# Altium PCB Beacon.PcbDoc
Units mm, origin at the board's own origin, x right, y up, seen from the top; angles counter-clockwise.
Board outline 47.6 x 56 mm, 2 copper layers (Top Layer, Bottom Layer); 33 components, 44 nets, 181 pads, 53 vias.
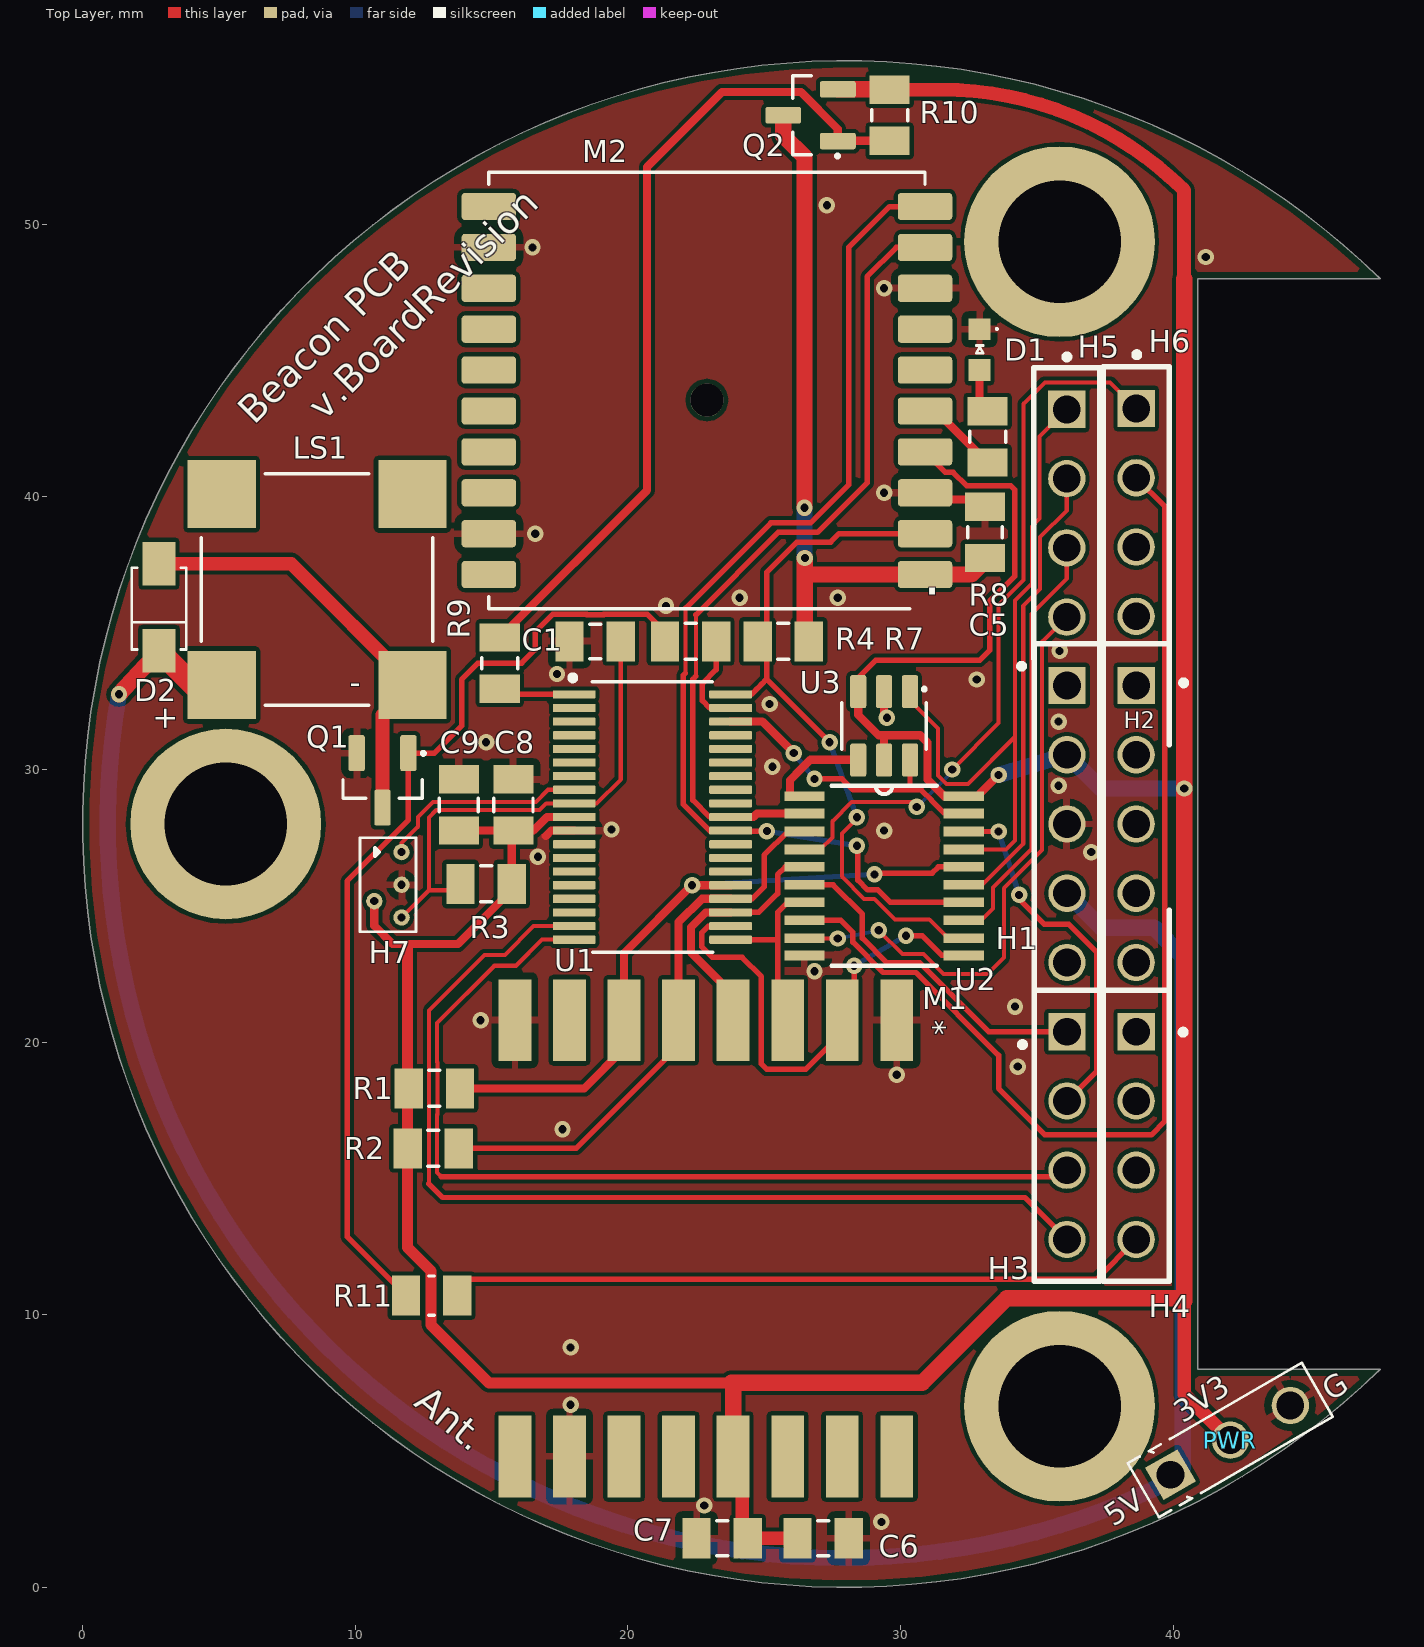
[diagram p0: Top Layer view]
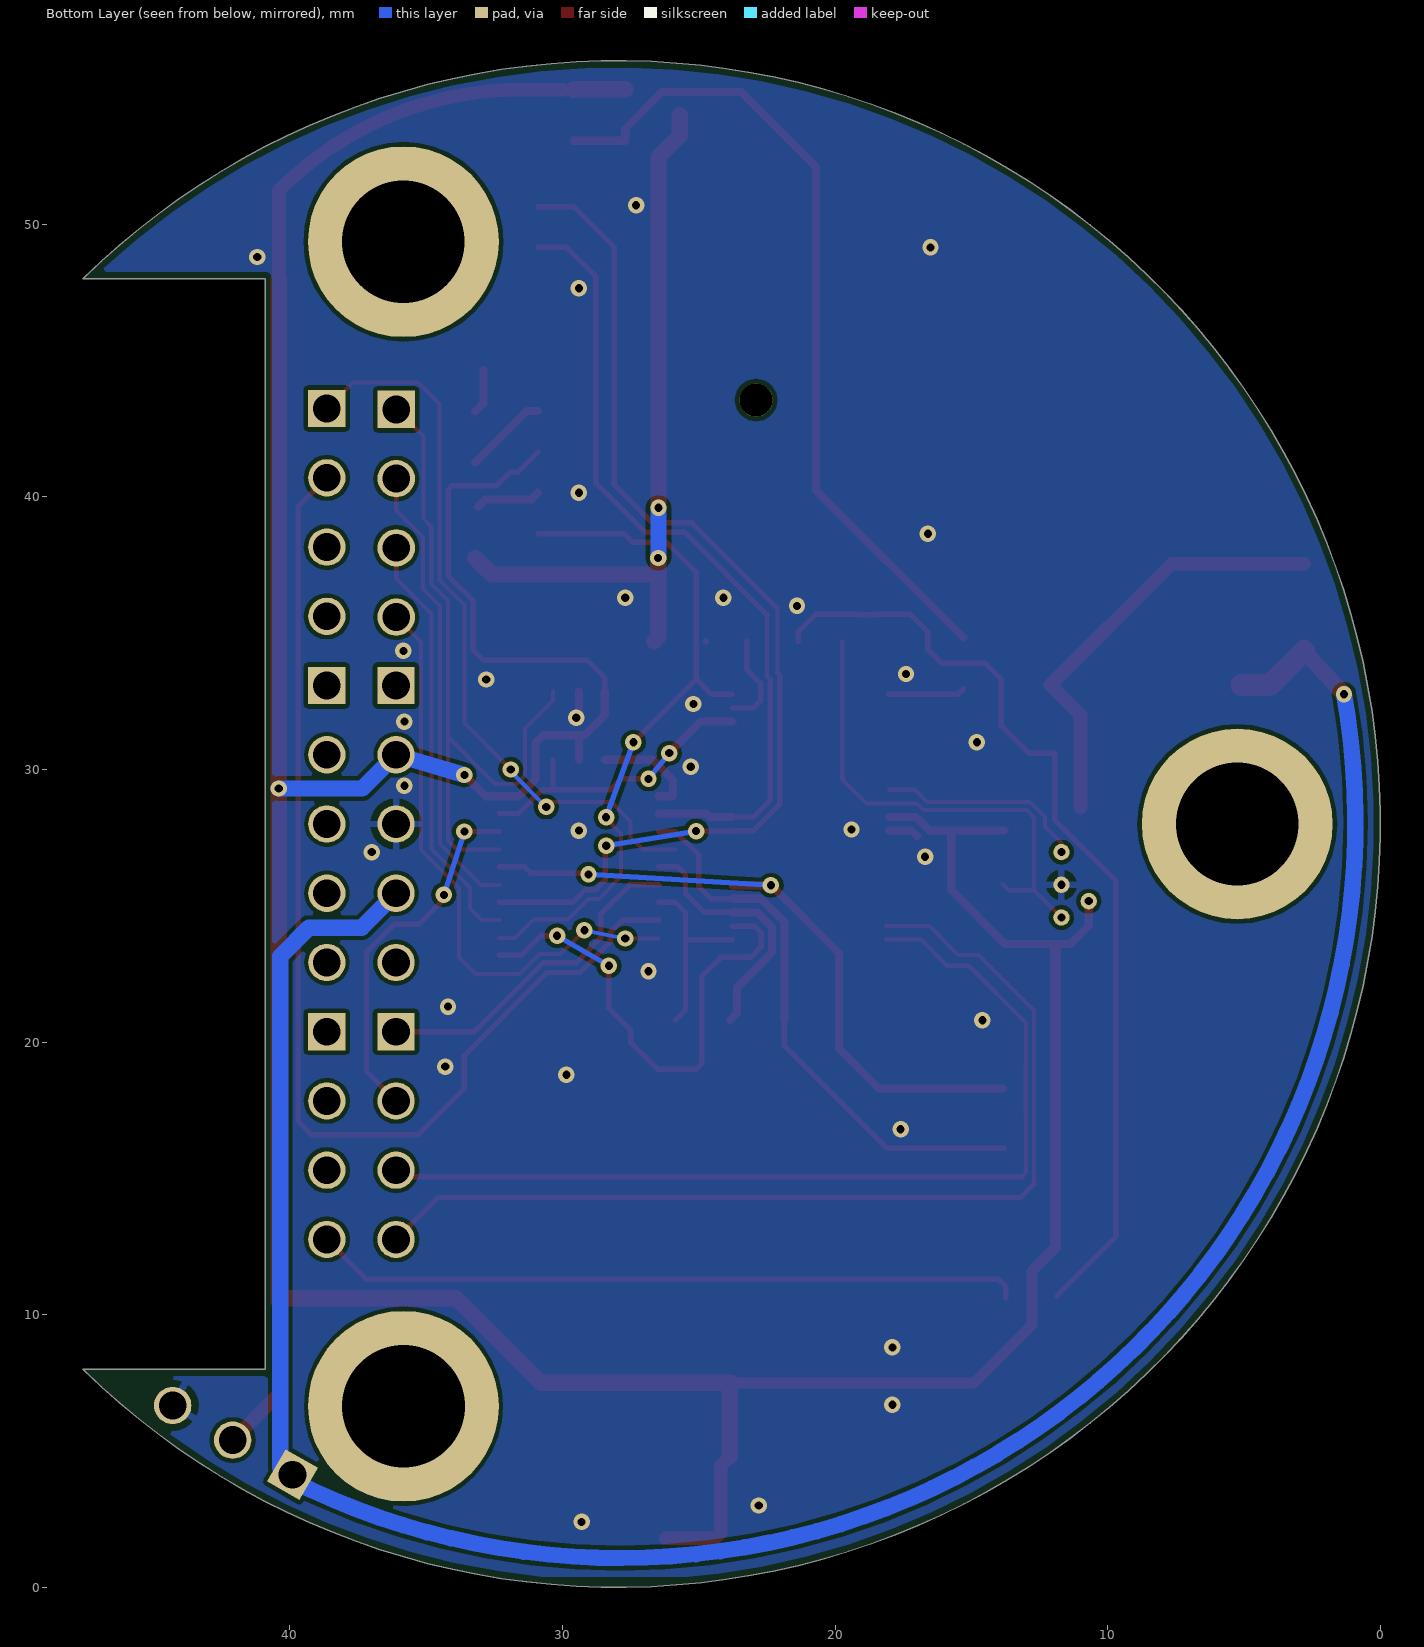
[diagram p1: Bottom Layer view, seen from below]

## Layer stack, top to bottom
Top Solder: solder mask 0.0102, Solder Resist, Dk 3.5
Top Layer: signal copper 0.0356
Dielectric 1: dielectric 0.32, FR-4, Dk 4.8
Bottom Layer: signal copper 0.0356
Bottom Solder: solder mask 0.0102, Solder Resist, Dk 3.5

## Board outline
47.596,8 cw(c28,28) 47.596,48 47.6,48 40.913,48 40.913,8

## Design rules (kind name [scope] priority, off if disabled: settings)
BoardOutlineClearance [All] p1: gap=0.254 ignorepadtopadclearanceinfootprint=FALSE except(0: Arc-SplitContinuation Track-SplitContinuation SMDPad-SplitContinuation THPad-SplitContinuation Via-SplitContinuation Fill-SplitContinuation Poly-SplitContinuation Region-SplitContinuation Text-SplitContinuation)
Clearance Clearance_1 [All] p1: gap=0.152 ignorepadtopadclearanceinfootprint=FALSE
HoleSize [All] p1: absolutevalues=TRUE maxlimit=6.2 minlimit=0.3 maxpercent=80.000 minpercent=20.000
MinimumAnnularRing [All] p1: minimumring=0.15
MinimumSolderMaskSliver [All] p1: minsoldermaskwidth=0.1
PolygonConnect ViaConnect [IsVia] p1: connectstyle=Direct reliefconductorwidth=0.254 reliefentries=4 polygonreliefangle="90 Angle" airgapwidth=0.254
PolygonConnect [All] p2: connectstyle=Relief reliefconductorwidth=0.254 reliefentries=4 polygonreliefangle="90 Angle" airgapwidth=0.254
RoutingVias [All] p1: holewidth=0.3 width=0.6 viastyle="Through Hole" minholewidth=0.3 minwidth=0.5 maxholewidth=1 maxwidth=5
SilkToSilkClearance [All] p1: silktosilkclearance=0.1
SilkToSolderMaskClearance [IsPad] p1: minsilkscreentomaskgap=0.1 clearancetoexposedcopper=TRUE
SolderMaskExpansion [All] p1: expansion=0.051 istentingtop=FALSE
SupplyNets "Schematic Supply Nets_5" [InNet('5V')] p1: voltage=0.000
SupplyNets "Schematic Supply Nets_4" [InNet('1V8')] p2: voltage=0.000
SupplyNets "Schematic Supply Nets_3" [InNet('GND')] p3: voltage=0.000
SupplyNets "Schematic Supply Nets_2" [InNet('Vbat')] p4: voltage=0.000
SupplyNets "Schematic Supply Nets_1" [InNet('3V3')] p5: voltage=0.000
SupplyNets "Schematic Supply Nets" [InNet('GPS_3V3')] p6: voltage=0.000
Width [All] p1: maxlimit=25.4 minlimit=0.15 preferedwidth=0.3
26 further rules are at their usual default settings.

## Components (designator, comment, footprint, x,y, rotation, side; value= is the part's Value field where it differs from the comment)
C1 "220pF" CAPACITOR_0805_2012M-70N 18.8,34.7 r0 top
C5 "22uF" CAPACITOR_0805_2012M-70N 33.1,38.7 r270 top
C6 "22uF" CAPACITOR_0805_2012M-70N 27.16,1.8 r0 top
C7 "220nF" CAPACITOR_0805_2012M-70N 23.46,1.8 r180 top
C8 "100n" CAPACITOR_0805_2012M-70N 15.8,28.7 r270 top
C9 "100n" CAPACITOR_0805_2012M-70N 13.8,28.7 r270 top
D1 "LTST-C190 Series" LED_0603_1608M_0.80mm 32.9,45.4 r270 top
D2 "1N4148W-7-F" SOD123 2.8,35.9 r270 top
H1 "SSQ-105-03-S-S" SAMTEC_SSQ-105-03-S-S 36.107,28 r270 top
H2 "SSQ-105-03-S-S" SAMTEC_SSQ-105-03-S-S 38.647,28 r270 top
H3 "SSQ-104-02-S-S" *SAMTEC_SSQ-104-02-S-S_SSQ-104-02-S-S(Primary)#1 36.107,16.57 r270 top
H4 "SSQ-104-02-S-S" *SAMTEC_SSQ-104-02-S-S_SSQ-104-02-S-S(Primary)#1 38.647,16.57 r270 top
H5 "SSQ-104-02-S-S" *SAMTEC_SSQ-104-02-S-S_SSQ-104-02-S-S(Primary)#2 36.1,39.4 r270 top
H6 "SSQ-104-02-S-S" *SAMTEC_SSQ-104-02-S-S_SSQ-104-02-S-S(Primary)#2 38.647,39.43 r270 top
H7 "Headerless Pogo Holes 4-pin" POGO_4_PIN_HEADER 11.2,25.77 r270 top
LS1 "CMT-8504-100-SMT-TR" XDCR_CMT-8504-100-SMT-TR 8.6,36.6 r90 top
M1 "LORA127X-C1" LoRa127X-C1 14.86,20.8 r270 top
M2 "CD-PA1616D" XCVR_CD-PA1616D 22.9,43.9 r180 top
PWR "HDR,2.54mm,1x3" HEADER_2.54MM_1x3PIN 42.1,5.4 r30 top
Q1 "AS2312" SOT23-3N-1.15mm 11,29.6 r270 top
Q2 "SSM3J328R,LF" SOT23F-3-0.8mm 26.7,54 r180 top
R1 "180k" Resistor_0805_2012M-50N 12.9,18.3 r180 top
R2 "180k" Resistor_0805_2012M-50N 12.86,16.1 r180 top
R3 "39k" Resistor_0805_2012M-50N 14.8,25.8 r0 top
R4 "1k" Resistor_0805_2012M-50N 22.3,34.7 r180 top
R7 "180k" Resistor_0805_2012M-50N 25.7,34.7 r0 top
R8 "1k" Resistor_0805_2012M-50N 33.2,42.2 r270 top
R9 "1k" Resistor_0805_2012M-50N 15.3,33.9 r270 top
R10 "39k" Resistor_0805_2012M-50N 29.6,54 r270 top
R11 "300" RESISTOR_0805_2012M-50N 12.8,10.7 r180 top
U1 "MSP430FR2355TDBTR" TSSOP65P640X120-0.5mm-38N 20.9,28.206 r0 top
U2 "74LVC244APW,118" SOP65P640X110-20N 29.4,26.1 r0 top
U3 "74LVC1G97W6-7" SOT23-6N-1.4mm 29.4,31.6 r270 top

## Footprints (in the part's own frame and the unit in brackets; to place one, negate y for a bottom-side part, rotate by r counter-clockwise, add the part's x,y. Pads: shape width x height; smd on the part's side, far side on the other; paste and mask are expansions set on the pad)
*SAMTEC_SSQ-104-02-S-S_SSQ-104-02-S-S(Primary)#1 [mm]
  rect 1.37x1.37 hole 1.02: 01(-3.81,0)
  round 1.37 hole 1.02 mask+0.051: 02(-1.27,0)
  round 1.37 hole 1.02: 03(1.27,0) 04(3.81,0)
  silkscreen extent -5.34,-1.73 5.34,1.2
*SAMTEC_SSQ-104-02-S-S_SSQ-104-02-S-S(Primary)#2 [mm]
  rect 1.37x1.37 hole 1.02: 01(-3.81,0)
  round 1.37 hole 1.02: 02(-1.27,0) 03(1.27,0) 04(3.81,0)
  silkscreen extent -5.83,-1.2 5.34,1.2
CAPACITOR_0805_2012M-70N [mm] "Capacitor, 0805 (2012 metric), 0.7mm high, nominal pads,"
  rect 1.04x1.47 smd mask+0.051: 1(-0.94,0) 2(0.94,0)
  silkscreen extent -0.2,-0.64 0.2,0.64, body extent -1,-0.73 1,0.73, height 1.23
HEADER_2.54MM_1x3PIN [mm]
  rect 1.37x1.37 hole 1.02: 1(-2.54,0)
  round 1.37 hole 1.02: 2(0,0) 3(2.54,0)
  silkscreen extent -3.68,-1.14 3.68,1.14, body extent -3.68,-1.14 3.68,1.14, height 8.2
LED_0603_1608M_0.80mm [mm] "LED, 0603 (1608 metric), 0.8mm high"
  rect 0.8x0.8 smd mask+0.051: A(0.75,0) C(-0.75,0)
  silkscreen extent -0.79,-0.12 0.13,0.66, body extent -0.8,-0.4 0.8,0.4, height 0.8
LoRa127X-C1 [mm]
  rect 3x1.2 smd paste-10 mask+0: 1(0,15) 2(0,13) 3(0,11) 4(0,9) 5(0,7) 6(0,5) 7(0,3) 8(0,1) 9(16,1) 10(16,3) 11(16,5) 12(16,7) 13(16,9) 14(16,11) 15(16,13) 16(16,15)
  body extent 0,0 16,16, height 2.1
POGO_4_PIN_HEADER [mm] "4-pin header for pogo pins"
  round 0.6 hole 0.3 mask+0.051: 1(-1.2,0.5) 2(0,0.5) 3(0.6,-0.5) 4(1.2,0.5)
  silkscreen extent -1.73,-1.02 1.72,1.03
Resistor_0805_2012M-50N [mm] "Resistor, 0805 (2012 metric), nominal pads"
  rect 1.04x1.47 smd mask+0.051: 1(-0.94,0) 2(0.94,0)
  silkscreen extent -0.2,-0.66 0.2,0.66, body extent -1,-0.63 1,0.62, height 0.5
RESISTOR_0805_2012M-50N [mm] "Resistor, 0805 (2012 metric), nominal pads"
  rect 1.04x1.47 smd mask+0.051: 1(-0.94,0) 2(0.94,0)
  silkscreen extent -0.1,-0.72 0.1,0.72, body extent -1,-0.63 1,0.62, height 0.5
SAMTEC_SSQ-105-03-S-S [mm]
  rect 1.37x1.37 hole 1.02: 1(-5.08,0)
  round 1.37 hole 1.02: 2(-2.54,0) 3(0,0) 4(2.54,0)
  round 1.37 hole 1.02 mask+0.051: 5(5.08,0)
  silkscreen extent -6.61,-1.76 6.61,1.2, body extent -6.6,-1.21 6.6,1.21, height 8.51
SOD123 [mm] "SOD-123; 2 Leads; Body 2.7 x 1.6 mm, (LxW)"
  rect 1.6x1.2 smd: 1(-1.65,0) 2(1.55,0)
  silkscreen extent -1.5,-1 1.5,1, body extent -1.8,-0.86 1.8,0.86, height 1.21
SOP65P640X110-20N [mil]
  rect 58x14 smd: 1(-115,115) 2(-115,90) 3(-115,64) 4(-115,38) 5(-115,13) 6(-115,-13) 7(-115,-38) 8(-115,-64) 9(-115,-90) 10(-115,-115) 11(115,-115) 12(115,-90) 13(115,-64) 14(115,-38) 15(115,-13) 16(115,13) 17(115,38) 18(115,64) 19(115,90) 20(115,115)
  silkscreen extent -76,-130 76,130
SOT23-3N-1.15mm [mm] "SOT23, 3-pin, 1.15mm high, nominal pads"
  rrect25% 1.32x0.6 smd mask+0.051: 1(-1,0.95) 2(-1,-0.95) 3(1,0)
  silkscreen extent -1.02,-1.45 0.65,1.52, body extent -1.19,-1.45 1.21,1.45, height 0.91
SOT23-6N-1.4mm [mm] "SOT23, 6 pins, nominal pads, 1.4mm high"
  rrect25% 1.21x0.59 smd mask+0.051: 1(-1.255,0.95) 2(-1.255,0) 3(-1.255,-0.95) 4(1.255,-0.95) 5(1.255,0) 6(1.255,0.95)
  silkscreen extent -1.37,-1.55 0.85,1.55, body extent -1.5,-1.55 1.5,1.55, height 1.4
SOT23F-3-0.8mm [mm] "SOT23, 3-pin, flat leads, 0.8mm high"
  rrect25% 1.32x0.6 smd mask+0.051: 1(-1,0.95) 2(-1,-0.95) 3(1,0)
  silkscreen extent -1.02,-1.45 0.65,1.52, body extent -1.2,-1.4 1.2,1.4, height 0.88
TSSOP65P640X120-0.5mm-38N [mm] "TSSOP/MSOP/VSSOP, 0.5mm pitch, 4.4mm wide, 38 pin nominal, 1.2mm high"
  rrect25% 1.57x0.3 smd mask+0.051: 1(-2.87,4.55) 2(-2.87,4.05) 3(-2.87,3.55) 4(-2.87,3.05) 5(-2.87,2.55) 6(-2.87,2.05) 7(-2.87,1.55) 8(-2.87,1.05) 9(-2.87,0.55) 10(-2.87,0.05) 11(-2.87,-0.45) 12(-2.87,-0.95) 13(-2.87,-1.45) 14(-2.87,-1.95) 15(-2.87,-2.45) 16(-2.87,-2.95) 17(-2.87,-3.45) 18(-2.87,-3.95) 19(-2.87,-4.45) 20(2.87,-4.45) 21(2.87,-3.95) 22(2.87,-3.45) 23(2.87,-2.95) 24(2.87,-2.45) 25(2.87,-1.95) 26(2.87,-1.45) 27(2.87,-0.95) 28(2.87,-0.45) 29(2.87,0.05) 30(2.87,0.55) 31(2.87,1.05) 32(2.87,1.55) 33(2.87,2.05) 34(2.87,2.55) 35(2.87,3.05) 36(2.87,3.55) 37(2.87,4.05) 38(2.87,4.55)
  silkscreen extent -3.02,-4.91 2.22,5.26, body extent -3.15,-4.8 3.15,4.9, height 1
XCVR_CD-PA1616D [mm]
  rrect25% 2x1 smd: 1(-8,6.75) 2(-8,5.25) 3(-8,3.75) 4(-8,2.25) 5(-8,0.75) 6(-8,-0.75) 7(-8,-2.25) 8(-8,-3.75) 9(-8,-5.25) 10(-8,-6.75) 11(8,-6.75) 12(8,-5.25) 13(8,-3.75) 14(8,-2.25) 15(8,-0.75) 16(8,0.75) 17(8,2.25) 18(8,3.75) 19(8,5.25) 20(8,6.75)
  round 1.21 hole 1.21 unplated: ""(0,0.35)
  silkscreen extent -8,-8 8,8, body extent -8,-8 8,8, height 6.7
XDCR_CMT-8504-100-SMT-TR [mm]
  rect 2.5x2.5 smd mask+0.051: 1(3.5,3.5) 2(3.5,-3.5) N(-3.5,-3.5) P(-3.5,3.5)
  silkscreen extent -4.25,-4.25 4.25,4.25, body extent -4.25,-4.25 4.28,4.28, height 4

## Part data
C1: library part "GCM2165CxxxxxF Series", "Passive - Capacitor Series, C0G, 5pF ~ 22nF, 50V, 0805 (2012 Metric), ±1%, -55°C ~ 125°C", Capacitance at Rated Voltage=100%, MF Part No.=GCM2165C1H221JA16D, Package=0805, Rated Voltage=50V, Temperature Coefficient=C0G, Temp Range="-55°C ~ 125°C", Tolerance=±1%, Value Range="5pF ~ 22nF", APSS Standard Part="APSS Standard", E Series=E24, Supplier 1=Digikey
C5 C6: library part C0805C226M9PACTU, "Passive - Capacitor, X5R, 22uF Max, 6.3V, 0805 (2012 Metric), ±20%, -55°C ~ 85°C. 8.8uF @ 5V", Capacitance at Rated Voltage=30%, Package=0805, Rated Voltage=6.3V, Supplier 1 Part No.=399-C0805C226M9PAC7800CT-ND, Temp Range="-55°C ~ 85°C", Temperature Coefficient=X5R, Tolerance=±20%, APSS Standard Part="APSS Standard", MF Part No.=C0805C226M9PACTU, Supplier 1=Digikey
C7: library part C0805C224K1RAC7800, "Passive - Capacitor, X7R, 220nF Max, 100V, 0805 (2012 Metric), ±10%, -55°C ~ 85°C. 200nF @ 10V, 110nF @ 50V, 55nF @ 100V", Capacitance at Rated Voltage=25%, Package=0805, Rated Voltage=100V, Supplier 1 Part No.=399-C0805C224K1RAC7800CT-ND, Temp Range="-55°C ~ 85°C", Temperature Coefficient=X7R, Tolerance=±10%, APSS Standard Part="APSS Standard", MF Part No.=C0805C224K1RAC7800, Supplier 1=Digikey
C8 C9: library part "Generic Capacitor", "Passive - Capacitor, Generic", Tolerance=?%
D1: "Diode - LED, 0603", Colour=Green, MF Part No.=LTST-C190KGKT, Package=0603, Rated Voltage="5V Reverse", Temp Range="-30°C ~ 85°C", APSS Standard Part="APSS Standard", Supplier 1=Digikey
D2: library part 1N4148_SMT_SOD123, "DIODE GEN PURP 100V 300MA SOD123", Base Part Number=1N4148W, Capacitance @ Vr, F="2pF @ 0V, 1MHz", Current - Average Rectified (Io)=150mA, Manufacturer="Diodes Incorporated", Manufacturer Part Number=1N4148W-13-F, Operating Temperature - Junction="-65°C ~ 150°C", Package / Case=SOD-123, Supplier Part Number 1=1N4148W-13FDICT-ND, Category="Discrete Semiconductor Products", ComponentLink1Description=https://www.diodes.com/assets/Datasheets/ds30086.pdf, ComponentLink1URL=https://www.diodes.com/assets/Datasheets/ds30086.pdf, Diode Type=Standard, Mounting Type="Surface Mount", Packaging="Cut Tape (CT)", Part Status=Active, Pricing 1="1=0.33, 10=0.292, 100=0.1586, 500=0.0976, 1000=0.06656 (NZD)", RoHS="RoHS Compliant", Speed="Small Signal =< 200mA (Io), Any Speed", Stock 1=5282, Supplier 1=Digi-Key, Supplier Device Package=SOD-123
LS1: "8.5 mm, 5 Vo-p, 100 dB, Surface Mount (SMT), Magnetic Audio Transducer Buzzer", MF Part No.=CMT-8504-100-SMT-TR
M1: "LoRa transceiver", MF Part No.=LORA127X-C1
M2: "CD-PA1616D GNSS patch antenna module", MF Part No.=CD-PA1616D
PWR: "Connector - 2.54mm, 1x3-pin"
Q1: "Transistor - MOSFET, N-Channel AS2312", Package=SOT23-3, Power=1.2W, Rated Voltage="20 Vds", Supplier 1 Part No.=4530-AS2312CT-ND, Temp Range="0°C ~ 150°C (TJ)", APSS Standard Part="APSS Standard", MF Part No.=AS2312, Supplier 1=Digikey
Q2: "Transistor - MOSFET, P-Channel SSM3J328R,LF", Package=SOT23-3, Power=1W, Rated Voltage="20 Vds", Supplier 1 Part No.=SSM3J328RLFCT-ND, Temp Range="0°C ~ 150°C (TJ)", APSS Standard Part="APSS Standard", MF Part No.=SSM3J328R,LF, Supplier 1=Digikey
R1 R2 R7: library part "RMCF0805JT Series", "Passive - Resistor Series, 0805, 5%, 100m - 22M, E24, 0.063W, 1/16W, ±200ppm/°C, -55°C ~ 155°C, 0805 (2012 Metric)", MF Part No.=RMCF0805JT180K, Package=0805, Power=1/8W, Rated Voltage=150V, Temp Range="-55°C ~ 155°C", Temperature Coefficient=±200ppm/°C, Tolerance=5%, Value Range="100m ~ 22M", APSS Standard Part="APSS Standard", E Series=E24, Supplier 1=Digikey
R3: library part "RMCF0805JT Series", "Passive - Resistor Series, 0805, 5%, 100m - 22M, E24, 0.063W, 1/16W, ±200ppm/°C, -55°C ~ 155°C, 0805 (2012 Metric)", MF Part No.=RMCF0805JT39K0, Package=0805, Power=1/8W, Rated Voltage=150V, Temperature Coefficient=±200ppm/°C, Temp Range="-55°C ~ 155°C", Tolerance=5%, Value Range="100m ~ 22M", APSS Standard Part="APSS Standard", E Series=E24, Supplier 1=Digikey
R4 R8 R9: library part "RMCF0805JT Series", "Passive - Resistor Series, 0805, 5%, 100m - 22M, E24, 0.063W, 1/16W, ±200ppm/°C, -55°C ~ 155°C, 0805 (2012 Metric)", MF Part No.=RMCF0805JT1K00, Package=0805, Power=1/8W, Rated Voltage=150V, Temp Range="-55°C ~ 155°C", Temperature Coefficient=±200ppm/°C, Tolerance=5%, Value Range="100m ~ 22M", APSS Standard Part="APSS Standard", E Series=E24, Supplier 1=Digikey
R10: library part "RMCF0805JT Series", "Passive - Resistor Series, 0805, 5%, 100m - 22M, E24, 0.063W, 1/16W, ±200ppm/°C, -55°C ~ 155°C, 0805 (2012 Metric)", MF Part No.=RMCF0805JT39K0, Package=0805, Power=1/8W, Rated Voltage=150V, Temp Range="-55°C ~ 155°C", Temperature Coefficient=±200ppm/°C, Tolerance=5%, Value Range="100m ~ 22M", APSS Standard Part="APSS Standard", E Series=E24, Supplier 1=Digikey
R11: library part "Generic Resistor", "Passive - Resistor, Generic", Tolerance=?%
U1: "IC - Microcontroller, TSSOP-38, 24MHz, 32KB FRAM, Op-Amps/PGAs, 12-bit DACs, 12-bit ADC, -40 to 105C", MF Part No.=MSP430FR2355TPT, Package=LQFP-48, Rated Voltage=3.6V, Supplier 1 Part No.=296-50260-ND, Temp Range="-40°C ~ 105°C", APSS Standard Part="APSS Standard", Supplier 1=Digikey
U2: "Octal buffer/line driver", Package=None, Availability=Unavailable, MP=74LVC244APW-118, Price=None
U3: "IC - Multifunction Logic Gate, 1 Circuit, 3 Input, 1.65 - 5.5V, AND, OR, NOT, MUX, SOT-23-6", Package=SOT-23-6, Rated Voltage=5.5V, Temp Range="-40°C ~ 125°C", APSS Standard Part="APSS Standard", MF Part No.=74LVC1G97W6-7, Supplier 1=Digikey, Supplier 1 Part No.=74LVC1G97W6-7
H1 H2: MF Part No.=SSQ-105-03-S-S

## Free pads (board coordinates)
  round 7 hole 4.5 mask+0.051: 1(5.25,28)
  round 7 hole 4.5: 1(35.837,6.643) 1(35.837,49.357)

## Via types
v1: diameter 0.6, hole 0.3, Top Layer to Bottom Layer, 32 vias
v2: diameter 0.6, hole 0.3, Top Layer to Bottom Layer, tented both sides, 19 vias
v3: diameter 0.6, hole 0.3, Top Layer to Bottom Layer, tented top, 2 vias

## Nets (pads, with @x,y where several pads share a name; then routed paths per layer and width w, separated by ;. In a path a pad name is that pad's centre, name@x,y a point inside that pad or via, vN(x,y) a via of type N, cw(c..) or ccw(c..) an arc to the next point about the centre after c; other vN are vias at no path point)
1V8: H1.1
1V8_EN: H2.3
1V8_PG: H2.1
3V3: C6.1 C7.1 C8.2 C9.2 H1.2 H7.3 M1.13 M2.4 PWR.2 Q2.2 R1.2 R2.2 R3.2 R10.1 U1.10 U2.20 U3.3 U3.5 | length 158.5
  Top Layer w0.2: U3.3 28.45,33.358 29.092,34 32.9,34 33.273,34.373 33.273,36.173 34.187,37.087 34.187,40.265 34.04,40.412 32.421,40.412 31.931,40.902 31.648,40.902 M2.4
  Top Layer w0.3: H7.3 10.7,24.268 11.368,23.6 13.764,23.6 15.74,25.576 R3.2 15.74,27.7 C8.2 ; C9.2 C8.2 ; U1.10 17.039,28.256 16.543,27.76 C8.2 ; U3.3 28.45,32.006 29.204,31.252 29.4,31.252 ; U3.5 29.4,31.252 ; R10.1 R10.1@29.98,54.94 ; v1(33.6,29.8) 32.821,29.021 U2.20 31.599,29.021 30.995,29.625 30.995,30.984 30.727,31.252 29.4,31.252
  Top Layer w0.4: 11.92,23.48 R2.2 11.92,12.464 12.782,11.602 12.782,9.618 14.9,7.5 23.8,7.5
  Top Layer w0.5: M1.13 24.2,4.46 24.2,2 C7.1 C6.1 ; R10.1@29.98,54.94 31.489,54.94 cw(c31.489,42.338) 40.4,51.249 40.4,48 40.409,47.991 ; 40.309,10.6 40.409,10.5 40.409,7.091 PWR.2 PWR.2@42.2,5.3
  Top Layer w0.6: M1.13 23.86,7.44 23.8,7.5 30.8,7.5 33.9,10.6 40.309,10.6 ; Q2.2 29.59,54.95 R10.1 ; 40.409,10.5 v1(40.409,29.3) 40.409,47.991
  Bottom Layer w0.6: v1(33.6,29.8) H1.2 37.347,29.3 v1(40.409,29.3)
3V3_EN: H2.4
3V3_PG: H2.2
5V: D2.2 H1.4 LS1.P PWR.1 | length 89.2
  Top Layer w0.6: v1(1.332,32.76) D2.2
  Top Layer w0.8: D2.2 4.05,33.1 LS1.P
  Bottom Layer w0.6: v1(1.332,32.76) ccw(c27.889,28.048) PWR.1@40.032,3.964 ; H1.4 37.367,24.2 39.3,24.2 40.359,23.141 40.359,4.389 PWR.1@40,4.03
5V_EN: H2.5
BTCRL0: H3.03 U1.19 | length 35.3
  Top Layer w0.15: 13.155,15.063 13.002,15.215 13.002,17.338 13.01,17.346 13.01,19.254 13.002,19.262 13.002,20.702 15.1,22.8 15.9,22.8 16.856,23.756 U1.19 U1.19@18.13,23.756 ; H3.03@36.107,15.063 H3.03
  Top Layer w0.2: 13.155,15.063 H3.03@36.107,15.063
BTCRL1: H3.04 U1.18 | length 37.3
  Top Layer w0.15: 12.7,14.8 12.7,17.463 12.707,17.471 12.707,19.129 12.7,19.137 12.7,21.16 14.74,23.2 15.486,23.2 16.542,24.256 U1.18 U1.18@18.13,24.256
  Top Layer w0.2: 12.7,14.8 13.2,14.3 34.567,14.3 H3.04
"Buzzer override": H4.04 R11.1 | length 26.1
  Top Layer w0.2: R11.1@13.74,10.6 R11.1 13.74,11.04 14,11.3 37.187,11.3 H4.04
G\P\S\_\E\N\: R9.2 U1.1 | length 2.8
  Top Layer w0.2: R9.2 15.504,32.756 U1.1
GND: C1.1 C5.1 C6.2 C7.2 C8.1 C9.1 D1.C H1.3 H7.2 M1.1 M1.8 M1.10 M2.3 M2.8 M2.12 M2.19 PWR.3 Q1.2 U1.11 U2.10 U3.2 | length 4.5
  Top Layer w0.3: 16.99,27.557 17.189,27.756 U1.11 ; U3.2 29.4,32 v1(29.5,31.9) ; M2.3 31.15,39.9 32.84,39.9 C5.1
  other v1: 29.3,2.4 17.6,16.8 29.86,18.8 34.3,19.1 14.6,20.8 34.2,21.3 29.4,27.756 19.4,27.8 25.3,30.1 25.2,32.4 32.8,33.3 21.4,36 24.1,36.3 27.7,36.3 16.6,38.65 29.4,40.15 29.4,47.65 41.2,48.8 16.5,49.15 27.3,50.7
  other v2: 17.9,6.7 17.9,8.8 26.846,22.6 16.7,26.8 37,26.97 35.8,29.4 14.8,31 35.8,31.756 17.4,33.5 35.837,34.35
  other v3: 22.8,3
"GPS R\e\s\e\t\": M2.2 R7.1 U1.38 U2.12 | length 26.2
  Top Layer w0.15: v2(28.4,28.25) 28.4,28.2 27.85,27.65 27.85,26.066 28.66,25.256 29.039,25.256 29.793,24.502 31.057,24.502 31.745,23.814 U2.12
  Top Layer w0.2: U1.38 24.536,32.756 24.9,33.12 ; 24.715,32.935 24.9,33.12 ; R7.1@24.743,34.683 24.725,34.701 R7.1@24.743,34.718 ; v1(27.4,31) 25.09,33.31 ; M2.2 27.748,38.65 27.441,38.343 26.201,38.343 25.1,37.242 25.1,33.32 25.09,33.31 ; 24.9,33.12 25.09,33.31
  Bottom Layer w0.2: v1(27.4,31) v2(28.4,28.25)
GPS_3V3: C5.2 M2.1 Q2.3 R7.2 | length 26.6
  Top Layer w0.6: Q2.3 25.7,53.25 26.479,52.471 v1(26.479,39.6) ; v1(26.493,37.76) 26.493,37.15 ; R7.2 26.493,34.847 26.493,37.15 ; C5.2@33.2,37.76 32.59,37.15 M2.1 26.493,37.15
  Bottom Layer w0.6: v1(26.479,39.6) 26.479,37.774 v1(26.493,37.76)
GPS_reset_stack: H6.02 U2.8 | length 41.7
  Top Layer w0.2: U2.8 27.807,24.474 28.252,24.029 28.252,23.668 29.368,22.552 30.565,22.552 33.6,19.517 33.6,18.3 35.3,16.6 39.2,16.6 39.7,17.1 39.7,39.647 H6.02
GPS_UART_RX: M2.10 U1.28 U2.14 | length 39.3
  Top Layer w0.15: 22.1,33.523 22.107,33.53 22.107,35.907
  Top Layer w0.2: 22.1,33.523 22.028,33.45 22.028,28.73 22.1,28.658 22.1,28.656 23,27.756 U1.28 23.786,27.74 v2(25.1,27.74) ; 22.107,35.907 25.248,39.048 26.708,39.048 28.1,40.44 28.1,49.15 29.6,50.65 M2.10 ; v2@28.435,26.948 28.435,25.944 28.796,25.583 29.175,25.583 29.624,25.135 U2.14
  Bottom Layer w0.2: v2(25.1,27.74) v2(28.4,27.2)
GPS_UART_RX_stack: H3.01 U2.6 | length 12.4
  Top Layer w0.2: U2.6 27.53,25.77 28.605,24.695 28.605,23.814 29.514,22.905 30.711,22.905 33.235,20.38 H3.01
GPS_UART_TX: M2.9 U1.29 U2.2 | length 29.7
  Top Layer w0.15: 22.493,35.673 22.493,33.871 22.5,33.863 22.5,33.424
  Top Layer w0.2: 22.493,35.673 25.515,38.695 26.955,38.695 28.775,40.515 28.775,48.075 29.85,49.15 M2.9 ; 22.5,33.424 22.38,33.304 22.38,28.876 23,28.256 U1.29
  Top Layer w0.3: U1.29 24.611,28.256 24.741,28.386 U2.2
GPS_UART_TX_stack: H3.02 U2.18 | length 13.4
  Top Layer w0.2: U2.18 v1(33.6,27.726) ; v1(34.353,25.4) 34.353,25.247 35.27,24.33 36.17,24.33 37.192,23.308 37.192,18.925 H3.02
  Bottom Layer w0.2: v1(33.6,27.726) v1(34.353,25.4)
I2C_SCL: M2.14
I2C_SDA: M2.15
JTAG_TEST/SBW_TCK: H7.1 U1.8 | length 7.7
  Top Layer w0.15: H7.1 11.7,27.3 12.3,27.9 12.3,28.264 12.846,28.81 16.631,28.81 17.078,29.256 U1.8
"LoRa Antenna": M1.9
"LoRa C\S\": M1.5 R2.1 U1.23 U2.3 | length 20.8
  Top Layer w0.2: R2.1 18.1,16.1 21.86,19.86 M1.5 ; U1.23 24.561,25.256 25,25.695 25,26.858 25.867,27.726 U2.3
  Top Layer w0.3: M1.5 21.86,24.4 22.716,25.256 U1.23
"LoRa R\e\s\e\t\": M1.6 R1.1 U1.24 U2.16 | length 25.2
  Top Layer w0.2: v2(29.048,26.152) 29.096,26.2 31.162,26.2 31.392,26.43 U2.16
  Top Layer w0.3: R1.1 18.4,18.3 19.86,19.76 M1.6 19.86,23.26 v1(22.356,25.756) U1.24
  Bottom Layer w0.2: v1(22.356,25.756) v2(29.048,26.152)
LoRa_CS_stack: H5.01 U2.17 U3.1 | length 25.8
  Top Layer w0.15: U3.1 30.35,32.527 31.373,31.505 31.373,29.781 31.681,29.473 32.473,29.473 34.2,31.2 ; U2.17 33.865,27.065 34.2,27.4 34.2,31.2 ; H5.01 35.1,42.21 35.1,39.2 34.817,38.917 34.817,36.817 34.2,36.2 34.2,31.2
LoRa_reset_stack: H6.01 U2.4 | length 27.1
  Top Layer w0.15: U2.4@25.87,27.065 U2.4 27.055,27.065 27.5,27.511 27.5,28.1 28.2,28.8 30.427,28.8 v2(30.599,28.627) ; v1(31.9,30) 33.6,31.7 33.6,36.037 34.515,36.952 34.515,43.415 35.3,44.2 37.687,44.2 H6.01
  Bottom Layer w0.15: v2(30.599,28.627) 31.9,29.928 v1(31.9,30)
MISO: M1.2 U1.21 U2.11 | length 18.4
  Top Layer w0.2: U1.21 22.956,24.256 22.715,24.015 22.715,23.491 23.101,23.105 24.195,23.105 24.9,22.4 24.9,19.2 25.092,19.008 26.525,19.008 27.5,19.983 27.5,20.44 M1.2 28.3,21.24 v2(28.3,22.798) ; v2(30.2,23.9) 30.8,23.9 31.521,23.179 U2.11
  Bottom Layer w0.2: v2(28.3,22.798) v2(30.2,23.9)
MISO_stack: H5.04 U2.9 | length 21.7
  Top Layer w0.15: U2.9 26.493,23.8 v2(27.7,23.8) ; v2(29.2,24.1) 30.068,23.232 30.846,23.232 31.578,22.5 33.2,22.5 33.8,23.1 33.8,25.645 35.194,27.039 35.194,34.684 H5.04
  Bottom Layer w0.15: v2(27.7,23.8) v2(29.2,24.1)
MOSI: M1.3 U1.20 U2.7 | length 7
  Top Layer w0.2: U1.20 25.446,23.756 25.49,23.8 ; M1.3 25.49,21.17 25.49,23.8 ; U2.7 25.868,25.135 25.49,24.757 25.49,23.8
MOSI_stack: H5.03 U2.13 | length 15.6
  Top Layer w0.15: U2.13 32.974,24.474 33.4,24.9 33.4,25.672 34.805,27.077 34.805,35.705 36.1,37 H5.03
NetD1_A: D1.A R8.1 | length 1.6
  Top Layer w0.3: D1.A 32.9,43.44 R8.1
NetD2_1: D2.1 LS1.N Q1.3 | length 16.1
  Top Layer w0.5: D2.1 7.65,37.55 LS1.N 11,32 Q1.3
NetM2_5: M2.5 R8.2 | length 3.1
  Top Layer w0.3: M2.5 31.31,43.15 R8.2
NetQ1_1: Q1.1 R4.2 R11.2 | length 35.2
  Top Layer w0.2: R11.2 9.7,12.86 9.7,25.9 11.95,28.15 Q1.1 12.9,30.6 13.9,31.6 13.9,33.3 14.5,33.9 16.1,33.9 16.6,34.4 16.6,35.052 17.235,35.687 18.485,35.687 18.489,35.683 19.111,35.683 19.115,35.687 20.713,35.687 21.36,35.04 R4.2
NetQ2_1: Q2.1 R9.1 R10.2 | length 30.5
  Top Layer w0.3: R9.1 20.7,40.24 20.7,52.1 23.45,54.85 26.35,54.85 27.7,53.5 Q2.1 27.71,53.06 R10.2
NetR4_1: R4.1 U1.37 | length 3.5
  Top Layer w0.2: R4.1 23.24,33.666 22.733,33.158 22.733,32.523 23,32.256 U1.37
Other_OE: U1.36 U2.19 U3.6 | length 11.1
  Top Layer w0.2: v3(26.846,29.654) 27.856,29.654 28.261,29.25 30.35,29.25 ; U3.6 30.35,29.25 ; U2.19 31.614,28.386 31.152,28.848 31.152,28.856 30.758,29.25 30.35,29.25
  Top Layer w0.3: U1.36 24.932,31.756 v1(26.088,30.6)
  Bottom Layer w0.2: v1(26.088,30.6) v3(26.846,29.654)
Reset/SBW_TDIO: C1.2 H7.4 R3.1 U1.9 | length 18
  Top Layer w0.15: H7.4 12.7,25.57 ; R3.1 13.63,25.57 12.7,25.57 ; C1.2 19.74,29.64 18.856,28.756 U1.9 17.005,28.756 16.757,28.507 12.971,28.507 12.7,28.237 12.7,25.57
SCK: M1.4 U1.22 U2.5 | length 9.5
  Top Layer w0.2: U1.22 24.797,24.756 25.49,25.449 25.49,26.146 25.774,26.43 U2.5
  Top Layer w0.3: U1.22 22.856,24.756 22.312,24.212 22.312,23.288 23.6,22 23.6,21.06 M1.4
SCK_stack: H5.02 U2.15 | length 16.9
  Top Layer w0.15: U2.15 32.997,25.77 34.502,27.275 34.502,36.002 35.12,36.62 35.12,38.525 36.1,39.505 H5.02
SPI_OE: U2.1 U3.4 | length 3.9
  Top Layer w0.3: U2.1 25.946,29.021 25.946,29.606 26.338,29.998 26.698,30.358 28.437,30.358 U3.4
Vbat: H1.5
pads on no net: H4.01 H4.02 H4.03 H6.03 H6.04 LS1.1 LS1.2 M1.7 M1.11 M1.12 M1.14 M1.15 M1.16 M2. M2.6 M2.7 M2.11 M2.13 M2.16 M2.17 M2.18 M2.20 U1.2 U1.3 U1.4 U1.5 U1.6 U1.7 U1.12 U1.13 U1.14 U1.15 U1.16 U1.17 U1.25 U1.26 U1.27 U1.30 U1.31 U1.32 U1.33 U1.34 U1.35

## Polygon pours and split planes (outlines as drawn)
GND on Bottom Layer "Bottom GND" (solid, remove dead copper, pour order 4): 6.085,56.1 48.37,56.1 48.37,7.375 41.376,0.382 14.618,0.382 0.119,14.881 0.119,35.963
GND on Top Layer "Top GND" (solid, remove dead copper, pour order 0): 16.166,56.289 38.255,56.289 49.461,47.016 41.351,47.016 41.351,8.438 48.561,8.438 40.123,0 15.89,0 0.094,15.797 0.094,40.216

## Silkscreen, mask and mechanical layers (free items; w line width, h text height)
Top Overlay:
  lines w0.2: 39.852,21.905 39.852,24.829
  text ".BoardRevision" at 9.5,43.4 h1 r45
  text "v" at 8.864,42.764 h1 r45
  text "Beacon PCB" at 6.3,42.6 h1 r45
  text "." at 30.835,36.411 h1.52
  text "G" at 45.8,6.8 h0.8 r33.02
  text "Ant." at 12.1,6.7 h1 r320.51
  text "3V3" at 40.359,6 h0.8 r33.02
  text "5V" at 37.8,2.2 h0.8 r33.02
Mechanical 1:
  text "Battery cutout" at 46.172,24.284 h1.52 r90
Board Outline:
  the board outline again, w0.1
Mechanical 15:
  lines w0.254: 41.46,9.025 41.46,47.025 49.46,47.025 49.46,9.025 41.46,9.025

## Text inside footprints (layer, text, board x,y; h text height)
LS1: Top Overlay "+" at 3.4,31.4 h0.81 r90; Top Overlay "-" at 10.2,33.4 h0.81 r180; Mechanical 13 "-" at 10.2,33.4 h0.81 r180; Mechanical 13 "+" at 4.868,30.772 h0.81 r90
M1: Top Overlay "*" at 30.86,20.8 h0.8 r270